# EAGLE board RomeBoardV1 (EAGLE 8.6.0)
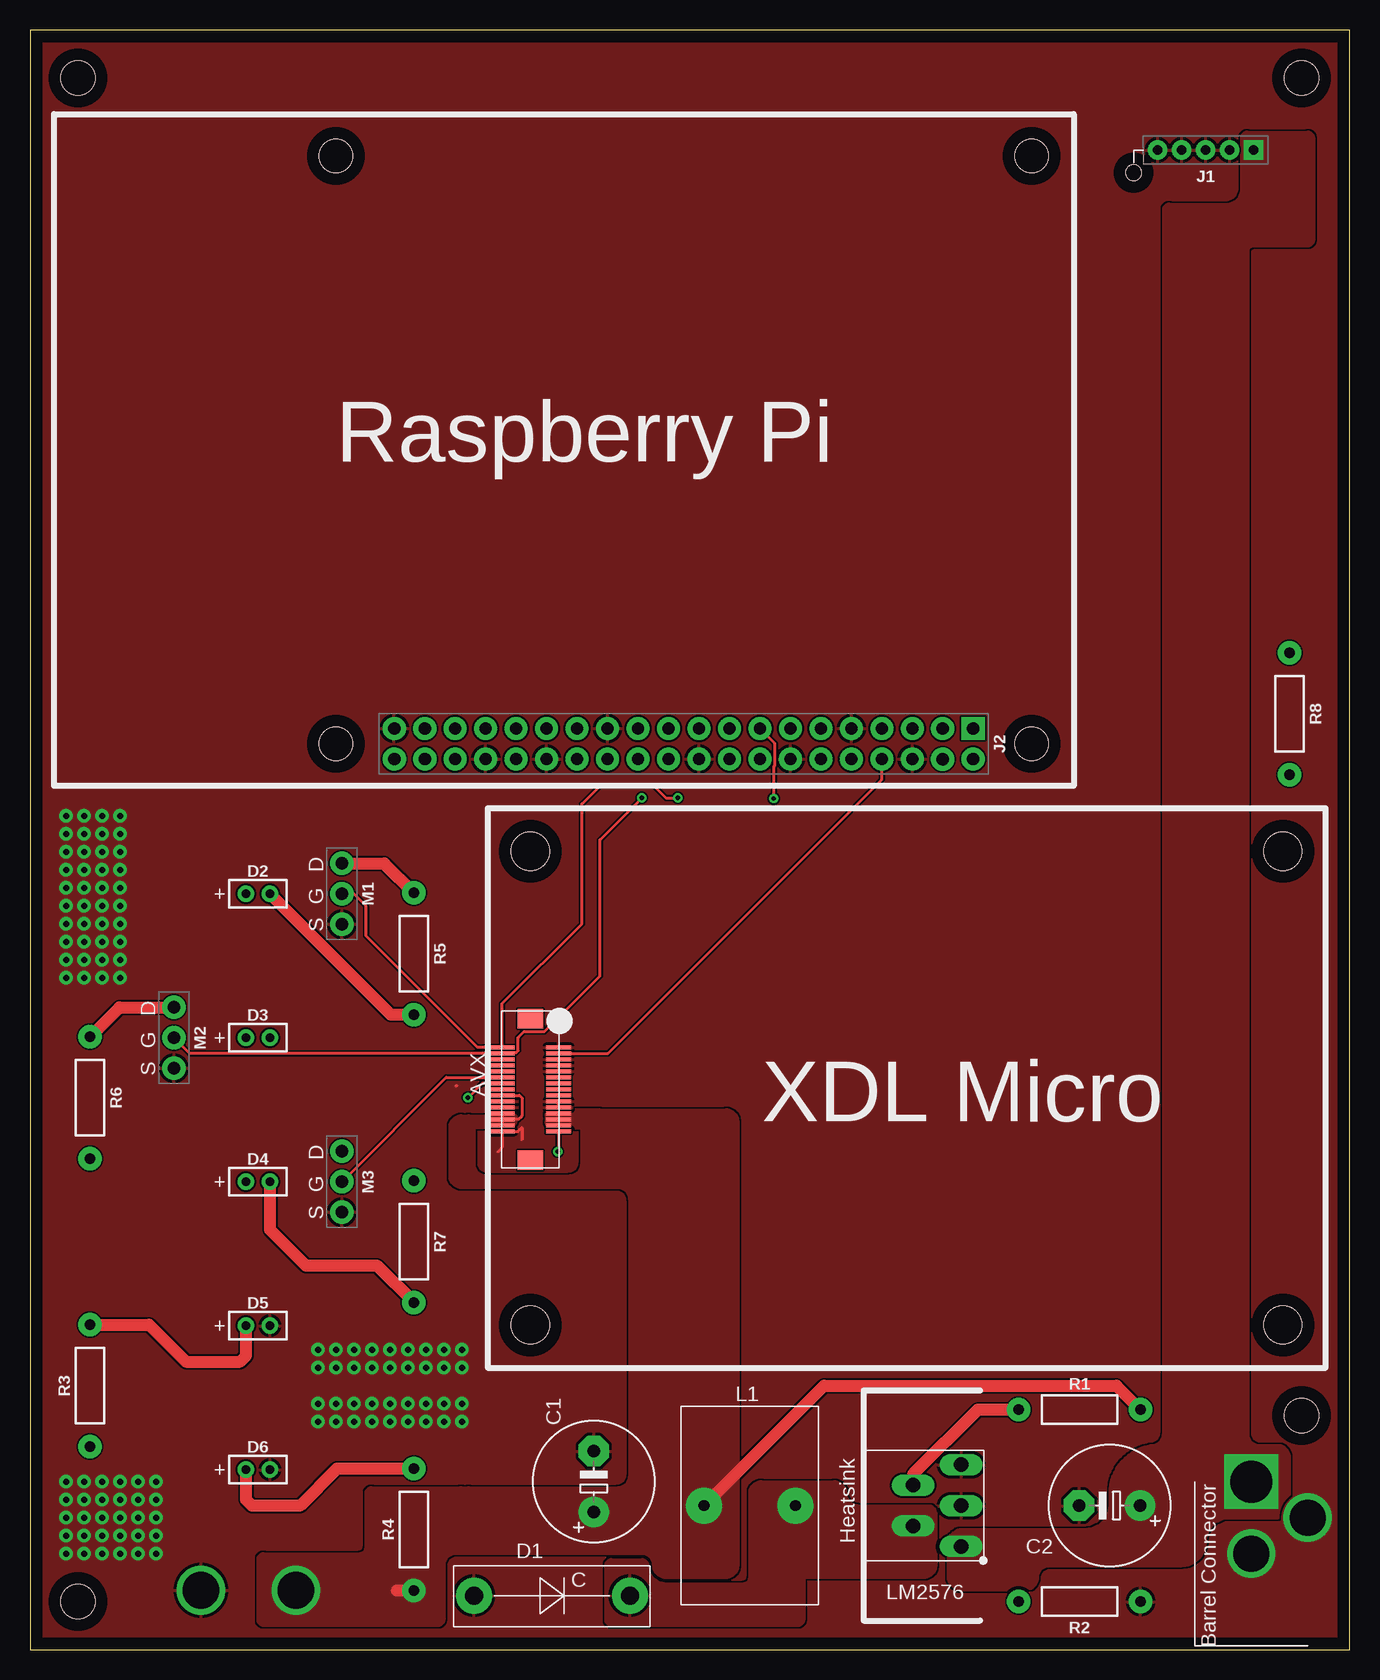
[diagram p0: board, top side]
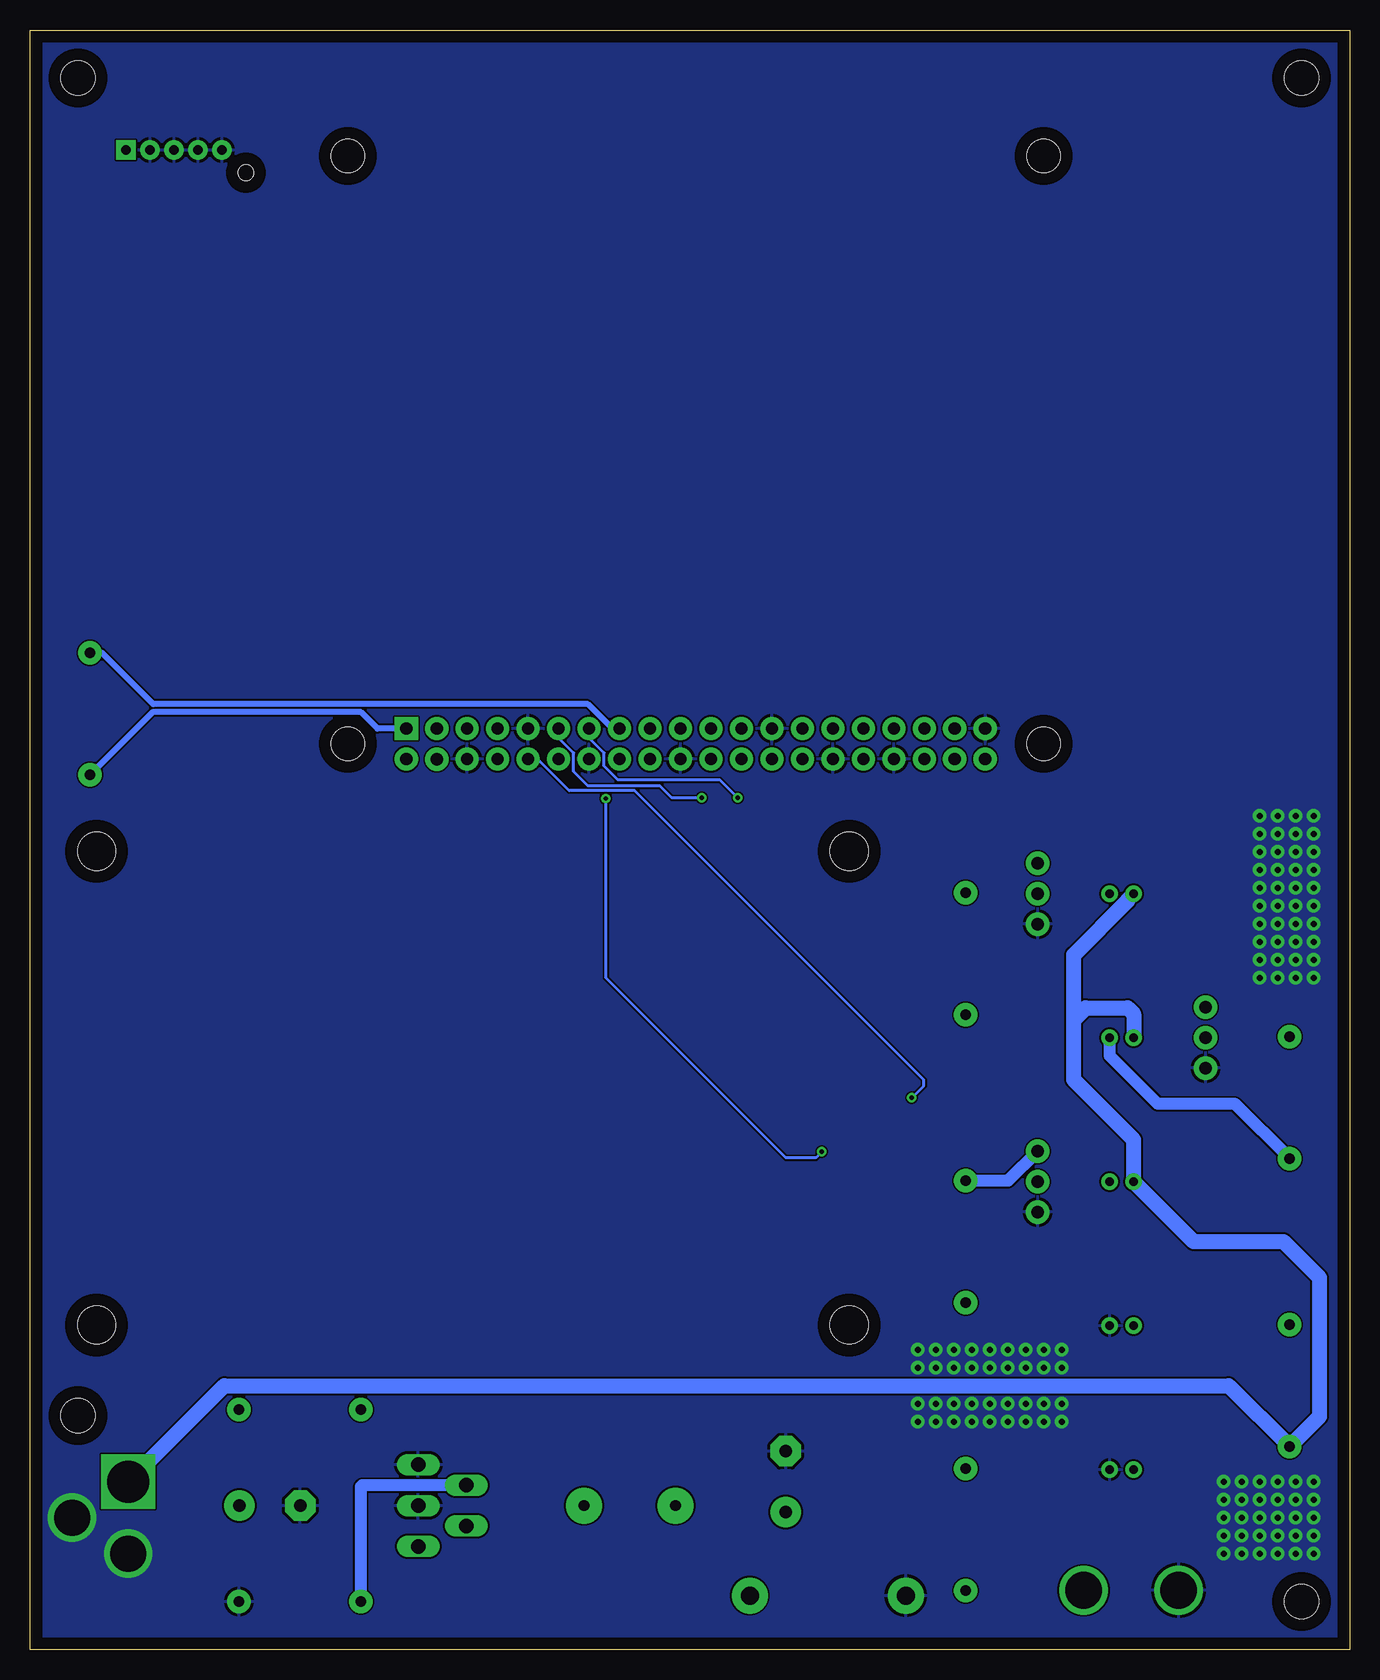
[diagram p1: board, bottom side, seen from below]

Size 110 x 135 mm. Coordinates in mm from the lower left corner, seen from the top.
Outline: 0,0 110,0 110,135 0,135 0,0
Copper layers (1*16): Top 0.035mm / dielectric 1.5mm / Bottom 0.035mm
Design rules "default *": minimum track width 6mil, minimum drill 0.35mm, track to track 6mil, track to pad 6mil, pad to pad 6mil, via to via 6mil, smd to smd 6mil, copper to edge 40mil, drill to drill 6mil, minimum pad ring 10mil, minimum via ring 8mil, stop-mask expansion 4mil, vias tented up to drill 0mil, thermal gap 10mil
Holes 2.75 mm at 25.5,124.5 83.5,124.5 25.5,75.5 83.5,75.5
Holes 3.18 mm at 41.71,66.55 104.44,66.55 41.71,27.06 104.44,27.06
Holes 2.84 mm at 4,4 106,19.5 4,131 106,131

## Footprints (pad centres in the part's own frame; a part is rotated, then mirrored left to right if it is on the bottom)
AVX-24-5046-630-829 = smd 0.3 x 2.1: P1 -3.45,2.35; P2 -3.45,-2.35; P3 -2.95,2.35; P4 -2.95,-2.35; P5 -2.45,2.35; P6 -2.45,-2.35; P7 -1.95,2.35; P8 -1.95,-2.35; P9 -1.45,2.35; P10 -1.45,-2.35; P11 -0.95,2.35; P12 -0.95,-2.35; P13 -0.45,2.35; P14 -0.45,-2.35; P15 0.05,2.35; P16 0.05,-2.35; P17 0.55,2.35; P18 0.55,-2.35; P19 1.05,2.35; P20 1.05,-2.35; P21 1.55,2.35; P22 1.55,-2.35; P23 2.05,2.35; P24 2.05,-2.35; P25 2.55,2.35; P26 2.55,-2.35; P27 3.05,2.35; P28 3.05,-2.35; P29 3.55,2.35; P30 3.55,-2.35 | smd 1.6 x 2.1: P31 -5.85,0; P32 5.95,0
E5-10,5 = drill 1.016 pad 2.54: + -2.54,0 | drill 1.016 pad 2.54 octagon: - 2.54,0
DO-201AD = drill 1.5 pad 3: P$1 -6.5,0; P$2 6.5,0
1X2-POL = drill 0.7 pad 1.4: 1 -1,0; 2 1,0
HEADER-05 = drill 0.8 pad 1.6 square: 1 -4,0 | drill 0.8 pad 1.6: 2 -2,0; 3 0,0; 4 2,0; 5 4,0 | hole 1.3: 6,1.9
HEADER-20X02 = drill 1.016 pad 1.93 square: P1 -1.27,24.13 | drill 1.016 pad 1.93: P2 1.27,24.13; P3 -1.27,21.59; P4 1.292,21.59; P5 -1.27,19.05; P6 1.27,19.05; P7 -1.27,16.51; P8 1.27,16.51; P9 -1.27,13.97; P10 1.27,13.97; P11 -1.27,11.43; P12 1.27,11.43; P13 -1.27,8.89; P14 1.27,8.89; P15 -1.27,6.35; P16 1.27,6.35; P17 -1.27,3.81; P18 1.27,3.81; P19 -1.27,1.27; P20 1.27,1.27; P21 -1.27,-1.27; P22 1.27,-1.27; P23 -1.27,-3.81; P24 1.27,-3.81; P25 -1.27,-6.35; P26 1.27,-6.35; P27 -1.27,-8.89; P28 1.27,-8.89; P29 -1.27,-11.43; P30 1.27,-11.43; P31 -1.27,-13.97; P32 1.27,-13.97; P33 -1.27,-16.51; P34 1.27,-16.51; P35 -1.27,-19.05; P36 1.27,-19.05; P37 -1.27,-21.59; P38 1.27,-21.59; P39 -1.27,-24.13; P40 1.27,-24.13
PE-53112NL = drill 0.889 pad 3: P$1 0,3.81; P$2 0,-3.81
TO-220-5-HEATSINK = drill 1.2 pad 1.45 long: P$1 -3.404,-8.128; P$2 -1.7,-4.126; P$3 0,-8.128; P$4 1.7,-4.126; P$5 3.404,-8.128
TO-923-MOS = drill 1.016 pad 1.93: 1 -2.54,0; 2 0,0; 3 2.54,0
AXIAL-0.4 = drill 0.9 pad 1.93: 1 -5.08,0; 2 5.08,0
PJ-002A = drill 3.5 square: P$1 -3,-4.7 | drill 3: P$2 3,-4.7; P$3 0,0
VIA-120MIL = drill 3.048: P$1 0,0

## Placement (x,y rotation side)
AVX  AVX-24-5046-030-630-829  [AVX-24-5046-630-829]  41.71,46.74 270 top
C1  680uF  [E5-10,5]  47,14 90 top
C2  100uF  [E5-10,5]  90,12 180 top
D1  1N5820  [DO-201AD]  43.5,4.5 0 top
D2  LEDTHRU-HOLE-CONNECTOR  [1X2-POL]  19,63 0 top
D3  LEDTHRU-HOLE-CONNECTOR  [1X2-POL]  19,51 0 top
D4  LEDTHRU-HOLE-CONNECTOR  [1X2-POL]  19,39 0 top
D5  LEDTHRU-HOLE-CONNECTOR  [1X2-POL]  19,27 0 top
D6  LEDTHRU-HOLE-CONNECTOR  [1X2-POL]  19,15 0 top
J1  HEADER-5  [HEADER-05]  98,125 180 top
J2  RASPBERRY-PI-HEADER  [HEADER-20X02]  54.5,75.5 270 top
L1  47uH  [PE-53112NL]  60,12 270 top
LM2576  LM2576HEATSINK  [TO-220-5-HEATSINK]  69.5,12 90 top
M1  2N7000  [TO-923-MOS]  26,63 270 top
M2  2N7000  [TO-923-MOS]  12,51 270 top
M3  2N7000  [TO-923-MOS]  26,39 270 top
R1  5.76K  [AXIAL-0.4]  87.5,20 0 top
R2  3K  [AXIAL-0.4]  87.5,4 180 top
R3  100R  [AXIAL-0.4]  5,22 90 top
R4  75R  [AXIAL-0.4]  32,10 90 top
R5  147R  [AXIAL-0.4]  32,58 270 top
R6  147R  [AXIAL-0.4]  5,46 270 top
R7  147R  [AXIAL-0.4]  32,34 270 top
R8  10K  [AXIAL-0.4]  105,78 270 top
U$2  PJ-002A  [PJ-002A]  106.5,11 270 top
V4  GND  [VIA-120MIL]  14.25,4.94 0 top
V5  3V6  [VIA-120MIL]  22.17,4.94 0 top

## Library data of the parts
AVX = CNTRL_BOARD
C1 C2 = resistor
D1-D6 J1 J2 L1 LM2576 M1-M3 U$2 V4 V5 = BrownSpaceEngineering
R1-R8 = passives

## Nets
3V3: J2.P1 R8.2
3V6: AVX.P18 AVX.P23 AVX.P24 AVX.P25 AVX.P26 AVX.P27 AVX.P28 C1.+ L1.P$2 R1.2 R4.1 V5.P$1
!SHDN: AVX.P29 J2.P15 R8.1
GND: AVX.P1 AVX.P5 AVX.P7 AVX.P9 AVX.P19 AVX.P20 AVX.P21 AVX.P22 AVX.P30 C1.- C2.- D1.P$1 D5.2 D6.2 J1.2 J1.3 J1.4 J1.5 J2.P6 J2.P9 J2.P14 J2.P20 J2.P25 J2.P30 J2.P34 J2.P39 LM2576.P$3 LM2576.P$5 M1.3 M2.3 M3.3 R2.1 U$2.P$2 U$2.P$3 V4.P$1
N$1: D1.P$2 L1.P$1 LM2576.P$2
N$2: D5.1 R3.2
N$3: D6.1 R4.2
N$4: D3.2 R6.2
N$5: M1.1 R5.1
N$6: M2.1 R6.1
N$7: M3.1 R7.1
N$8: LM2576.P$4 R1.1 R2.2
N$9: D4.2 R7.2
N$10: D2.2 R5.2
PWR_L: AVX.P12 M3.2
RX_D: AVX.P14 J2.P10
RX_L: AVX.P4 J2.P13 M2.2
TX_D: AVX.P3 J2.P8
TX_L: AVX.P2 J2.P11 M1.2
VIN: C2.+ D2.1 D3.1 D4.1 J1.1 LM2576.P$1 R3.1 U$2.P$1

## Tracks (layer width: path | path; a pad name or v marks a point on that pad's centre or on a via)
3V3
  Bottom 0.508: J2.P1 81.03,76.77 82.4,78.14 99.78,78.14 R8.2
3V6
  Top 0.254: AVX.P18 40.81,46.19 41,46 41,44.5 40.69,44.19 AVX.P26 | AVX.P24 AVX.P26 | AVX.P26 AVX.P28
  Top 1: L1.P$2 66.19,22 90.58,22 R1.2 | 30.58,4.92 R4.1
  Top 1.016: 32.42,4.92 R4.1
  pour Top (isolate 0.305, no thermals): 59,44 59,7 arc-90 58,6 53,6 arc-90 52,7 arc90 51,8 36,8 arc-90 35,9 35,12.5 arc-90 36,13.5 49,13.5 arc90 50,14.5 50,37.5 arc90 49,38.5 36,38.5 arc-90 35,39.5 35,43.5 arc-90 36,44.5 36.5,44.5 arc-90 37,44 37,40.5 arc90 38,39.5 45,39.5 arc90 46,40.5 46,44 arc-90 46,45 58,45 arc-90
  pour Top (isolate 0.305, no thermals): 36.5,44.5 40,44.5 arc-90 40.5,44.5 arc-90 40,43.5 37,43.5 arc-90 36.5,44 arc-90
  pour Top (isolate 0.305, no thermals): 47.5,45 43.5,45 arc90 43,44.5 43,44 arc90 43.5,43.5 46.5,43.5 arc90 47,44 47.5,44.5 arc90
  pour Top (isolate 0.305, no thermals): 36.5,8 35.5,8 arc90 34.5,7 34.5,2.5 arc-90 34,2 19.5,2 arc-90 19,2.5 19,7.5 arc-90 19.5,8 27.5,8 arc90 28,8.5 28,13 arc-90 28.5,13.5 36.5,13.5 arc-90 37,13 37,8.5 arc-90
!SHDN  (via drill 0.35)
  Top 0.254: AVX.P29 44.06,41.56 v44,41.5 | v62,70.94 62,73.62 62.09,73.71 62.09,75.53 J2.P15
  Bottom 0.254: v44,41.5 44.5,41 47,41 62,56 v62,70.94
  Bottom 0.508: J2.P15 61.45,76.77 63.49,78.81 99.72,78.81 104,83.08 R8.1
GND  (via drill 0.5 pad 1.1)
  Top 0.254: 39,41.5 39.36,41.86 AVX.P30 40.69,43.19 41,43.5 41,42.5 | 39.29,45.76 AVX.P20 | 35.5,47 35.57,47 | AVX.P21 AVX.P19
  other vias: 3,69.5 3,68 3,66.5 3,65 3,63.5 3,62 3,60.5 3,59 3,57.5 3,56 4.5,56 4.5,57.5 4.5,59 4.5,60.5 4.5,62 4.5,63.5 4.5,65 4.5,66.5 4.5,68 4.5,69.5 6,69.5 6,68 6,66.5 6,65 6,63.5 6,62 6,60.5 6,59 6,57.5 6,56 7.5,56 7.5,57.5 7.5,59 7.5,60.5 7.5,62 7.5,63.5 7.5,65 7.5,66.5 7.5,68 7.5,69.5 24,25 25.5,25 27,25 28.5,25 31.5,25 33,25 34.5,25 36,25 30,25 24,23.5 27,23.5 28.5,23.5 25.5,23.5 30,23.5 31.5,23.5 34.5,23.5 33,23.5 36,23.5 36,20.5 34.5,20.5 33,20.5 31.5,20.5 30,20.5 28.5,20.5 27,20.5 25.5,20.5 24,20.5 24,19 25.5,19 27,19 28.5,19 30,19 31.5,19 33,19 34.5,19 36,19 4.5,14 6,14 3,14 7.5,14 9,14 10.5,14 3,12.5 4.5,12.5 7.5,12.5 9,12.5 6,12.5 10.5,12.5 10.5,11 9,11 7.5,11 6,11 4.5,11 3,11 3,9.5 4.5,9.5 6,9.5 7.5,9.5 9,9.5 10.5,9.5 3,8 4.5,8 6,8 7.5,8 9,8 10.5,8
  pour Top (rank 6): 0,135 110,135 110,0 0,0
  pour Bottom: 0,0 110,0 110,135 0,135
N$1
  pour Top (isolate 0.305, no thermals): 69,12 75,12 arc-90 75.5,11 75.5,7 arc-90 74.5,6 61,6 arc-90 60,7 60,13 arc-90 61,14 67,14 arc-90 68,13 arc90
  pour Top (isolate 0.305): 48.5,7.5 51,7.5 arc-90 51.5,7 arc90 53,5.5 59,5.5 59.5,5.5 arc90 60,6 60,9 arc-90 60.5,9.5 61,9.5 64,9.5 arc-90 64.5,9 64.5,3 64.5,2.5 arc-90 64,2 48.5,2 arc-90 48,2.5 48,7 arc-90
N$2
  Top 1: R3.2 9.92,27.08 13,24 17.5,24 18,24.5 D5.1
N$3
  Top 1: R4.2 25.58,15.08 22.5,12 18.5,12 18,12.5 D6.1
N$4
  Bottom 1: R6.2 9.58,45.5 16,45.5 20,49.5 D3.2
N$5
  Top 1: M1.1 29.54,65.54 R5.1
N$6
  Top 1: R6.1 7.46,53.54 M2.1
N$7
  Bottom 1: M3.1 28.46,39.08 R7.1
N$8
  Top 1: R1.1 79,20 73.63,14.63 LM2576.P$4
  Bottom 1: LM2576.P$4 82.3,13.7 82.42,13.58 R2.2
N$9
  Top 1: R7.2 28.92,32 23,32 20,35 D4.2
N$10
  Top 1: D2.2 30.08,52.92 R5.2
PWR_L
  Top 0.254: M3.2 34.69,47.69 AVX.P12
RX_D  (via drill 0.35)
  Top 0.254: AVX.P14 37.69,47.19 v36.5,46
  Bottom 0.254: J2.P10 67.69,74.23 65.05,71.59 59.59,71.59 35.5,47.5 35.5,47 v36.5,46
RX_L  (via drill 0.35)
  Top 0.254: M2.2 13.31,49.69 AVX.P4 39.43,49.76 40.53,49.76 40.69,49.92 40.69,51.02 41.18,51.51 42.88,51.51 47.5,56.13 47.5,67.5 v51,71
  Bottom 0.254: J2.P13 63.39,75.99 62.15,74.75 62.15,73.64 61,72.5 52.5,72.5 v51,71
TX_D
  Top 0.254: AVX.P3 48.19,49.69 71.01,72.51 J2.P8
TX_L  (via drill 0.35)
  Top 0.254: M1.2 27,63 28,62 28,59.5 37.31,50.19 AVX.P2 39.36,53.86 46,60.5 46,70.5 47.5,72 52,72 53,71 v54,71
  Bottom 0.254: J2.P11 65.93,75.99 64.69,74.75 64.69,73.19 63.5,72 57.5,72 56.5,71 v54,71
VIN
  Bottom 1.27: D2.1 18.51,62.49 18.51,62.38 23,57.9 23,52.5 | 23,52.5 23,47.5 18,42.5 D4.1 13,34 5.5,34 2.5,31 2.5,19.42 R3.1 10.08,22 93.8,22 U$2.P$1 | 23,52.5 22,53.5 18.5,53.5 18,53 D3.1
  pour Top (isolate 0.305, no thermals): 77.5,10 arc90 76.5,8 76.5,6 arc90 78,5 83,5 arc90 84,6 arc-90 85,7 96,7 arc90 98,9 arc-90 100,11 104,11 arc90 105,12 105,16 arc90 104,17 94,17 arc90 90,13 90,12 arc-90 88,10
  pour Top: 94.5,17 94,17 arc90 95,16.5 arc-90
  pour Top: 93.5,17 arc90 94.5,18 94.5,120 arc-90 95,120.5 100,120.5 arc90 101,122 101,126 arc-90 101.5,126.5 106.5,126.5 arc-90 107,126 107,117.5 arc-90 106.5,117 102,117 arc90 101.5,116.5 101.5,18 arc90 102.5,17 103.5,17 arc-90 103.5,16.5 arc-90 102,16 93.5,16 arc-90 93,16.5 arc-90

## Text on the board
tPlace: Raspberry Pi | XDL Micro
tDocu: BROWN SPACE ENGINEERING GROUND STATION | Pi Power | Brown U. / Providence, R.I. / U.S.A. / / April 2018 | Viviana Arrunategui / Manav Kohli / Caelan Ritter | Che piacere / vederti! | TX | RX | Radio Power | 5V | 3.6V